# Altium PCB PCB Rev 1.PcbDoc
Units mm, origin at the board's own origin, x right, y up, seen from the top; angles counter-clockwise.
Board outline 128 x 53 mm, 2 copper layers (Top Layer, Bottom Layer); 47 components, 53 nets, 205 pads, 80 vias.
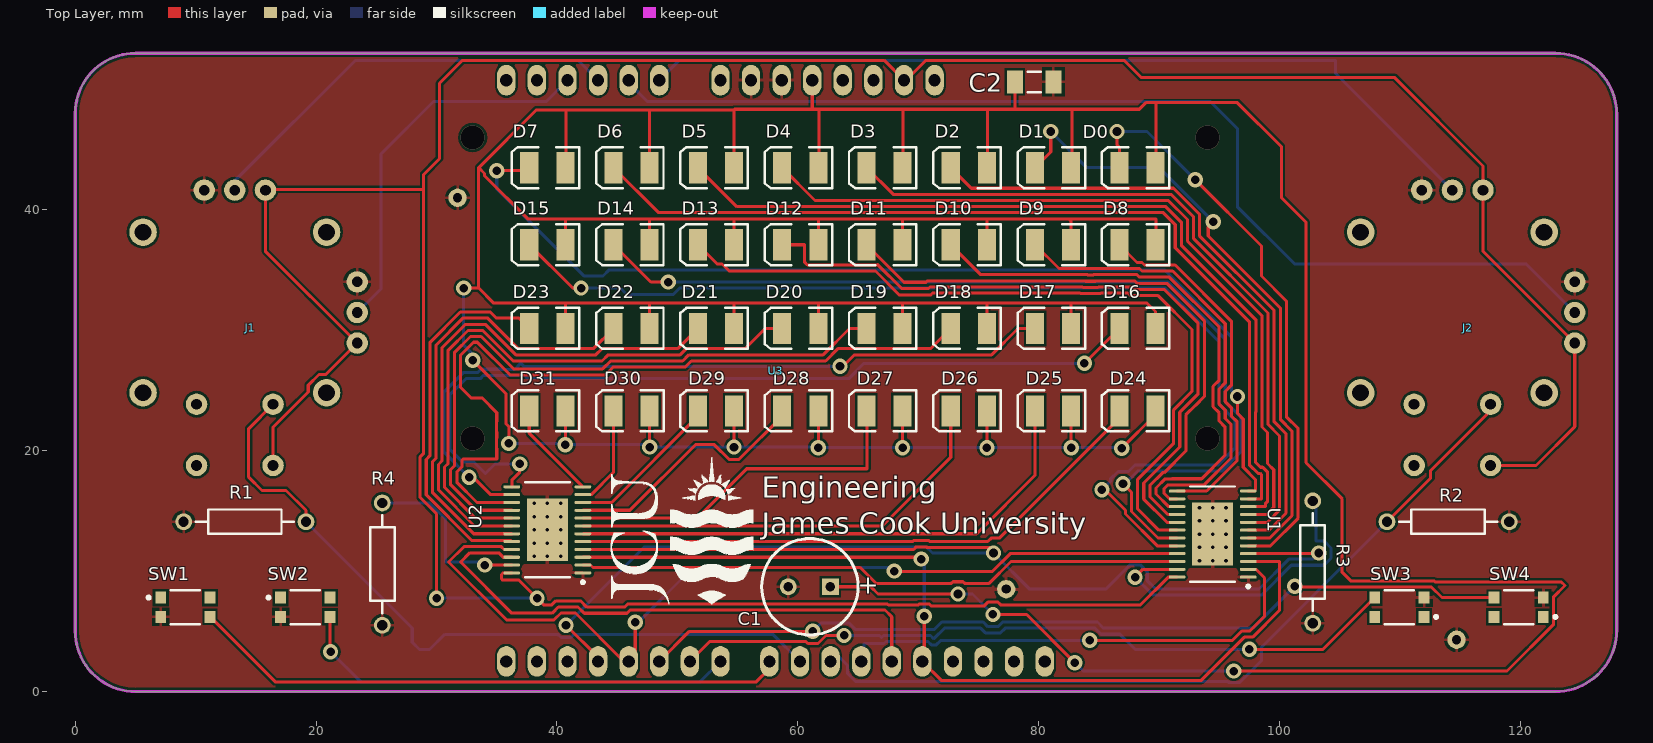
[diagram p0: Top Layer view]
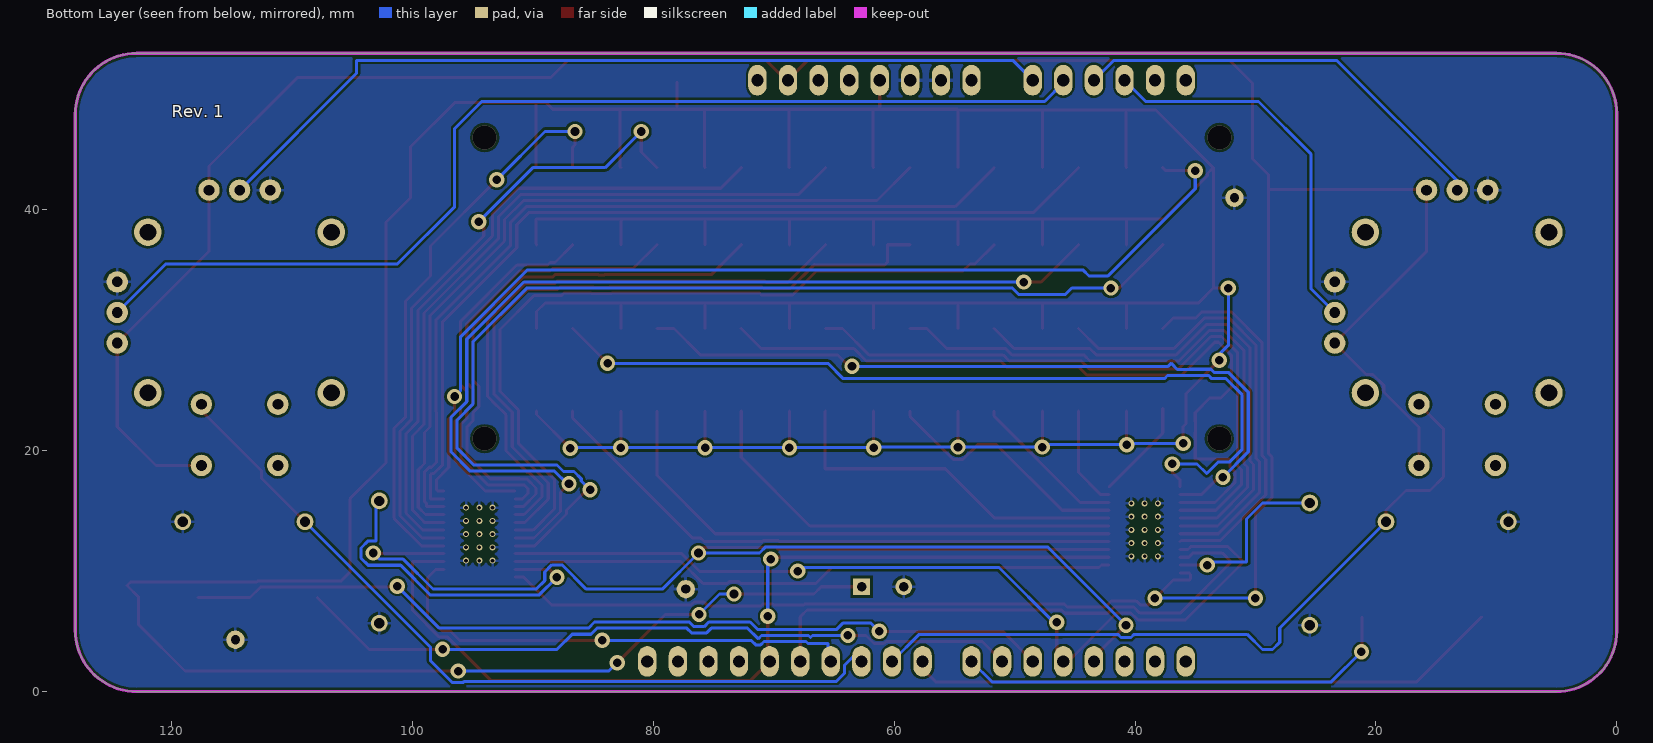
[diagram p1: Bottom Layer view, seen from below]

## Layer stack, top to bottom
Top Solder: solder mask 0.0102, Solder Resist, Dk 3.5
Top Layer: signal copper 0.0356
Dielectric 1: dielectric 0.32, FR-4, Dk 4.8
Bottom Layer: signal copper 0.0356
Bottom Solder: solder mask 0.0102, Solder Resist, Dk 3.5

## Board outline
5,0 cw(c5,5) 0,5 0,48 cw(c5,48) 5,53 122.92,53 cw(c122.92,47.92) 128,47.92 128,5.08 cw(c122.92,5.08) 122.92,0

## Design rules (kind name [scope] priority, off if disabled: settings)
Clearance [All] p1: gap=0.203 ignorepadtopadclearanceinfootprint=FALSE
Height [All] p1: minheight=0 maxheight=50 prefheight=12.7
HoleSize [All] p1: absolutevalues=TRUE maxlimit=3 minlimit=0.3 maxpercent=80.000 minpercent=20.000
PolygonConnect [All] p1: connectstyle=Relief reliefconductorwidth=0.254 reliefentries=4 polygonreliefangle="90 Angle" airgapwidth=0.254
RoutingVias [All] p1: holewidth=0.711 width=1.27 viastyle="Through Hole" minholewidth=0.711 minwidth=1.27 maxholewidth=0.711 maxwidth=1.27
SolderMaskExpansion [All] p1: expansion=0.102
UnRoutedNet [All] p1: checkbadconnections=TRUE
Width [All] p1: maxlimit=0.254 minlimit=0.203 preferedwidth=0.254
27 further rules are at their usual default settings.

## Classes and differential pairs
component class Main_Shield: J1 J2 R1 R2 SW1 SW2 SW3 SW4 U3
component class LED_Controllers: C1 C2 C? D0 D1 D2 D3 D4 D5 D6 D7 D8 D9 D10 D11 D12 D13 D14 D15 D16 D17 D18 D19 D20 D21 D22 D23 D24 D25 D26 D27 D28 D29 D30 D31 R3 R4 U1 U2

## Components (designator, comment, footprint, x,y, rotation, side; value= is the part's Value field where it differs from the comment)
C1 "100uF, 50V" "Capacitor radial 8mm" 62.7,8.7 r180 top
C2 "CAP 1uF" CAPC1206(3216)130_M 79.625,50.625 r0 top value=1uF
D0 "LED3" 3.5X2.8X1.9 88.2,43.5 r180 top
D1 "LED3" 3.5X2.8X1.9 81.2,43.5 r180 top
D2 "LED3" 3.5X2.8X1.9 74.2,43.5 r180 top
D3 "LED3" 3.5X2.8X1.9 67.2,43.5 r180 top
D4 "LED3" 3.5X2.8X1.9 60.2,43.5 r180 top
D5 "LED3" 3.5X2.8X1.9 53.2,43.5 r180 top
D6 "LED3" 3.5X2.8X1.9 46.2,43.5 r180 top
D7 "LED3" 3.5X2.8X1.9 39.2,43.5 r180 top
D8 "LED3" 3.5X2.8X1.9 88.2,37.1 r180 top
D9 "LED3" 3.5X2.8X1.9 81.2,37.1 r180 top
D10 "LED3" 3.5X2.8X1.9 74.2,37.1 r180 top
D11 "LED3" 3.5X2.8X1.9 67.2,37.1 r180 top
D12 "LED3" 3.5X2.8X1.9 60.2,37.1 r180 top
D13 "LED3" 3.5X2.8X1.9 53.2,37.1 r180 top
D14 "LED3" 3.5X2.8X1.9 46.2,37.1 r180 top
D15 "LED3" 3.5X2.8X1.9 39.2,37.1 r180 top
D16 "LED3" 3.5X2.8X1.9 88.2,30.15 r180 top
D17 "LED3" 3.5X2.8X1.9 81.2,30.15 r180 top
D18 "LED3" 3.5X2.8X1.9 74.2,30.15 r180 top
D19 "LED3" 3.5X2.8X1.9 67.2,30.15 r180 top
D20 "LED3" 3.5X2.8X1.9 60.2,30.15 r180 top
D21 "LED3" 3.5X2.8X1.9 53.2,30.15 r180 top
D22 "LED3" 3.5X2.8X1.9 46.2,30.15 r180 top
D23 "LED3" 3.5X2.8X1.9 39.2,30.15 r180 top
D24 "LED3" 3.5X2.8X1.9 88.2,23.3 r180 top
D25 "LED3" 3.5X2.8X1.9 81.2,23.3 r180 top
D26 "LED3" 3.5X2.8X1.9 74.2,23.3 r180 top
D27 "LED3" 3.5X2.8X1.9 67.2,23.3 r180 top
D28 "LED3" 3.5X2.8X1.9 60.2,23.3 r180 top
D29 "LED3" 3.5X2.8X1.9 53.2,23.3 r180 top
D30 "LED3" 3.5X2.8X1.9 46.2,23.3 r180 top
D31 "LED3" 3.5X2.8X1.9 39.2,23.3 r180 top
J1 "Joystick" JOYSTICK 13.25,31.475 r180 top
J2 "Joystick" JOYSTICK 114.35,31.475 r180 top
R1 "Resistor Axial-0.4" AXIAL-0.4 14.08,14.1 r0 top value=10K
R2 "Resistor Axial-0.4" AXIAL-0.4 114,14.1 r180 top value=10K
R3 "Res2" AXIAL-0.4 102.75,10.75 r270 top value=1K
R4 "Res2" AXIAL-0.4 25.5,10.58 r270 top value=1K
SW1 "KMR231GLFS" CKCP-KMR231GLFS 9.15,7 r0 top
SW2 "KMR231GLFS" CKCP-KMR231GLFS 19.1,7 r0 top
SW3 "KMR231GLFS" CKCP-KMR231GLFS 109.95,7 r180 top
SW4 "KMR231GLFS" CKCP-KMR231GLFS 119.85,7 r180 top
U1 "STP16CPC26XTR" "STP16CPC26XTR TSSOP-24" 94.45,13.075 r180 top
U2 "STP16CPC26XTR" "STP16CPC26XTR TSSOP-24" 39.2,13.425 r180 top
U3 "Arduino_Uno" ArduinoUnoR3 99.296,53.3 r180 top locked

## Footprints (in the part's own frame and the unit in brackets; to place one, negate y for a bottom-side part, rotate by r counter-clockwise, add the part's x,y. Pads: shape width x height; smd on the part's side, far side on the other; paste and mask are expansions set on the pad)
3.5X2.8X1.9 [mm] "SM LED; 2 C-Bend Leads; Body 3.5 x 2.8 x 1.9 mm, inc leads (LxWxH typ)"
  rect 1.5x2.6 smd: 1(-1.5,0) 2(1.5,0)
  silkscreen extent -2.65,-1.7 2.95,1.7
ArduinoUnoR3 [mil]
  oval 60x100 hole 40: 0(2500,2000) 1(2400,2000) 2(2300,2000) 3(2200,2000) 4(2100,2000) 5(2000,2000) 6(1900,2000) 7(1800,2000) 8(1640,2000) 9(1540,2000) 10(1440,2000) 11(1340,2000) 12(1240,2000) 13(1140,2000) 14(1040,2000) 15(940,2000) 16(840,2000) 17(740,2000) A0(2000,100) A1(2100,100) A2(2200,100) A3(2300,100) A4(2400,100) A5(2500,100) P1(1800,100) P2(1700,100) P3(1600,100) P4(1500,100) P5(1400,100) P6(1300,100) P7(1200,100) P8(1100,100)
  body extent 690,50 2550,2050, height 335
AXIAL-0.4 [mm] "Axial Device, Thru-Hole; 2 Leads; 0.4 in Pin Spacing"
  round 1.4 hole 0.85: 1(-5.08,0) 2(5.08,0)
  silkscreen extent -4.06,-1.02 4.06,1.02
"Capacitor radial 8mm" [mm] "Radial electrolytic cap, 8mm body, 3.5mm pin separation"
  rect 1.4x1.4 hole 0.8: 1(0,0)
  round 1.4 hole 0.8: 2(3.5,0)
  silkscreen extent -2.3,-4 5.7,4, body extent -2.2,-4 5.8,4, height 11.5
CAPC1206(3216)130_M [mm] "Chip Capacitor, Body 3.2x1.6mm, Height 1.3mm, IPC Low Density"
  rect 1.35x1.9 smd: 1(-1.6,0) 2(1.6,0)
  silkscreen extent -0.55,-0.85 0.55,0.85, body extent -1.7,-0.9 1.7,0.9, height 1.3
CKCP-KMR231GLFS [mm] "SMD, 4-Leads, Body 4.6x2.8mm"
  rect 0.9x1 smd: 1(-2.05,0.8) 2(-2.05,-0.8) 3(2.05,0.8) 4(2.05,-0.8)
  silkscreen extent -3.17,-1.4 1.21,1.4, body extent -2.3,-1.4 2.3,1.4, height 1.92
JOYSTICK [mil] "Sparkfun Joystick COM-09032"
  round 70 hole 35.43: B1A(-125,500) B1B(125,500) B2A(-125,300) B2B(125,300)
  round 70 hole 35: H1(-100,-400) H2(0,-400) H3(100,-400) V1(-400,100) V2(-400,0) V3(-400,-100)
  round 90 hole 55: MOUNT1(-300,262.5) MOUNT2(-300,-262.5) MOUNT3(300,-262.5) MOUNT4(300,262.5)
  body extent -530,-530 520,558, height 1190
"STP16CPC26XTR TSSOP-24" [mm] "TSOP, 24-Leads, Body 7.80x4.40mm, Pitch 0.65mm, Thermal Pad 5.20x3.40mm, IPC Medium Density"
  oval 1.4x0.25 smd mask+0.05: 1(-2.95,3.575) 2(-2.95,2.925) 3(-2.95,2.275) 4(-2.95,1.625) 5(-2.95,0.975) 6(-2.95,0.325) 7(-2.95,-0.325) 8(-2.95,-0.975) 9(-2.95,-1.625) 10(-2.95,-2.275) 11(-2.95,-2.925) 12(-2.95,-3.575) 13(2.95,-3.575) 14(2.95,-2.925) 15(2.95,-2.275) 16(2.95,-1.625) 17(2.95,-0.975) 18(2.95,-0.325) 19(2.95,0.325) 20(2.95,0.975) 21(2.95,1.625) 22(2.95,2.275) 23(2.95,2.925) 24(2.95,3.575)
  rect 3.4x5.2 smd: 25(0,0)
  silkscreen extent -3.08,-3.95 1.85,4.47, body extent -3.19,-3.95 3.19,3.95, height 1.1

## Part data
C1: library part "Cap 100uF, 50V, THT radial", "Electrolytic Capacitor, 100 µF, 50 V, ± 20%, Radial Leaded, 8 mm"
C2: library part CMP-1037-04700-1, "CAP 1uF 25V ±10% 1206 (3216 Metric) Thickness 1.3mm SMD", Case-EIA=1206, Case-Metric=3216, Rated Voltage="25 V", Tolerance=±10%, Max Thickness="1.3 mm", Technology=SMT
D0 D1 D2 D3 D4 D5 D6 D7 D8 D9 D10 D11 D12 D13 D14 D15 D16 D17 D18 D19 D20 D21 D22 D23 D24 D25 D26 D27 D28 D29 D30 D31: "Typical BLUE SiC LED", DatasheetVersion=16-Apr-2002, LatestRevisionDate=17-Dec-2003, LatestRevisionNote="PCB Footprint replaced.", PackageDescription="SM LED; 2 C-Bend Leads; Body 3.5 x 2.8 x 1.9 mm, inc leads (LxWxH typ)", PackageReference=3.5X2.8X1.9, PackageVersion=16-Apr-2002, Published=8-Jun-2000, Publisher="Altium Limited"
J1 J2: "Sparkfun Joystick COM-09032"
R1 R2 R3 R4: "Resistor", LatestRevisionDate=17-Jul-2002, LatestRevisionNote="Re-released for DXP Platform.", PackageDescription="Axial Device, Thru-Hole; 2 Leads; 0.4 in Pin Spacing", PackageReference=AXIAL-0.4, Published=8-Jun-2000, Publisher="Altium Limited"
SW1 SW2 SW3 SW4: library part CMP-2000-06516-1, "Switch Tactile, SPST, 50 mA, 32 V, -40 to 85 degC, 4-Pin SMD, RoHS, Tape and Reel", Actuator Color=N/A, Contact Rating @ Voltage=1A, Dielectric Strength=>=250Vrms, Manufacturer="C&K Components", Maximum DC Voltage Rating=32V, Minimum Insulation Resistance=>=1000MOhm, Operating Force=3N, Operating Temperature=-40to85C, Package Description="4-Pin Surface Mount Device, Body 4.6 x 2.8 mm", Actuator Length=0.5mm, Actuator Style=Button, Base Material=N/A, Body Orientation=Straight, Contact Material=Silver, Contact Plating=Silver, Datasheet URL=http://www.ck-components.com/media/1479/kmr2.pdf, Datasheet Version=06/2016, Dimension=2.8x4.6x1.9mm, ECCN=EAR99, Electrical Life=N/A, Family=KMR2, Ground Terminal=Yes, Housing Material=N/A, HTS=8536501199, Illumination Type=N/R, Manufacturer URL=http://www.ckswitches.com/, Maximum AC Voltage Rating=N/A, Mechanical Life=150000Cycles, Mounting=SurfaceMount,GullWing, Mounting Technology=SurfaceMount, Package Reference=KMR231GLFS, Packaging=TapeandReel, Part No=KMR231GLFS, Pole Throw Configuration=SPST, Product Weight=N/A, RoHS=Yes, Seal Description=N/A, Seal Location=N/A, Supplier=C&KComponents, Switch Configuration=N.O., Type=Micro-Miniature
U1 U2: library part "LED sink driver 16 ch STP16CPC26XTR", "ST Microelectronics STP16CPC26XTR constant current LED sink driver", Supplier Part Number 1=2460710, Supplier 1="element14 APAC", Supplier 2=Digikey, Supplier 3=Newark, Supplier Part Number 2=497-11984-1-ND, Supplier Part Number 3=38Y7958
U3: "Template for building an Arduino shield"

## Free pads (board coordinates)
  round 1.524 hole 0.762: 3(31.75,41) 4(77.3,8.5) 5(114.7,4.3)

## Via types
v1: diameter 1.27, hole 0.711, Top Layer to Bottom Layer, 46 vias
v2: diameter 0.5, hole 0.3, Top Layer to Bottom Layer, 30 vias
v3: diameter 2, hole 2, Top Layer to Bottom Layer, 4 vias

## Nets (pads, with @x,y where several pads share a name; then routed paths per layer and width w, separated by ;. In a path a pad name is that pad's centre, name@x,y a point inside that pad or via, vN(x,y) a via of type N, cw(c..) or ccw(c..) an arc to the next point about the centre after c; other vN are vias at no path point)
5V: C1.1 C2.1 D0.1 D1.1 D2.1 D3.1 D4.1 D5.1 D6.1 D7.1 D8.1 D9.1 D10.1 D11.1 D12.1 D13.1 D14.1 D15.1 D16.1 D17.1 D18.1 D19.1 D20.1 D21.1 D22.1 D23.1 D24.1 D25.1 D26.1 D27.1 D28.1 D29.1 D30.1 D31.1 U3.P4 | length 489.9
  Top Layer w0.254: v1(32.25,33.5) 33.5,33.5 ; v1(33,27.5) 35.75,24.75 35.75,22.25 36,22 v1(36,20.6) ; v1(40.7,20.5) D31.1 ; D23.1 40.7,32.2 40.75,32.25 ; D15.1 40.7,39.2 40.75,39.25 ; D7.1 40.75,43.55 40.75,48.3 ; v1(47.7,20.3) D30.1 ; D22.1 47.7,32.2 47.75,32.25 ; D14.1 47.7,39.2 47.75,39.25 ; D6.1 47.7,48.2 47.8,48.3 ; v1(54.7,20.3) D29.1 ; D21.1 54.7,32.2 54.75,32.25 ; D13.1 54.7,39.2 54.75,39.25 ; D5.1 54.7,48.3 ; U3.P4 61.196,48.35 ; v1(61.7,20.25) D28.1 ; D20.1 61.7,32.2 61.75,32.25 ; D12.1 61.7,39.2 61.75,39.25 ; D4.1 61.75,43.55 61.75,48.35 ; C1.1 66.058,8.7 66.658,8.1 v1(73.3,8.1) ; v1(68.7,20.25) D27.1 ; D19.1 68.7,32.2 68.75,32.25 ; D11.1 68.7,39.2 68.75,39.25 ; D3.1 68.75,43.55 68.75,48.35 ; v1(75.7,20.25) D26.1 ; D18.1 75.7,32.2 75.75,32.25 ; D10.1 75.7,39.2 75.75,39.25 ; D2.1 75.75,43.55 75.75,48.35 ; v1(76.2,6.4) 79,6.4 v1(83,2.4) ; C2.1 78.025,48.35 ; v1(82.7,20.25) D25.1 ; D17.1 82.7,32.2 82.75,32.25 ; D9.1 82.7,39.05 82.5,39.25 ; D1.1 82.75,43.55 82.75,48.35 ; v1(86.9,20.2) 89.7,23 D24.1 ; D16.1 89.7,31.55 89,32.25 82.75,32.25 ; D8.1 89.75,37.15 89.75,39.25 82.5,39.25 ; D0.1 89.75,43.55 89.75,48.9 ; v1(96.2,1.7) 118.889,1.7 122.731,5.542 122.731,7.831 123.7,8.8 123.4,9.1 112.907,9.1 112.818,9.189 105.911,9.189 105.2,9.9 105.2,16 102.2,19 102.2,38.975 100.15,41.025 100.15,45.25 96.5,48.9 89.75,48.9 ; 33.5,33.5 33.5,43.5 ; 33.5,33.5 34.75,32.25 40.75,32.25 ; 33.5,43.5 38.3,48.3 40.75,48.3 ; 33.5,43.5 33.984,43.016 33.984,42.829 37.563,39.25 40.75,39.25 ; 40.75,32.25 47.75,32.25 ; 40.75,39.25 47.75,39.25 ; 40.75,48.3 47.8,48.3 ; 47.75,32.25 54.75,32.25 ; 47.75,39.25 54.75,39.25 ; 47.8,48.3 54.7,48.3 ; 54.7,48.3 54.75,48.35 61.196,48.35 ; 54.75,32.25 61.75,32.25 ; 54.75,39.25 61.75,39.25 ; 61.196,48.35 61.75,48.35 ; 61.75,32.25 68.75,32.25 ; 61.75,39.25 68.75,39.25 ; 61.75,48.35 68.75,48.35 ; 68.75,32.25 75.75,32.25 ; 68.75,39.25 75.75,39.25 ; 68.75,48.35 75.75,48.35 ; 75.75,32.25 82.75,32.25 ; 75.75,39.25 82.5,39.25 ; 75.75,48.35 78.025,48.35 ; 78.025,48.35 82.75,48.35 ; 82.75,48.35 88.35,48.35 88.9,48.9 89.75,48.9
  Bottom Layer w0.254: v1(32.25,33.5) 32.25,28.75 33,28 v1(33,27.5) ; v1(36,20.6) 40.6,20.6 v1(40.7,20.5) 47.5,20.5 v1(47.7,20.3) v1(54.7,20.3) 61.65,20.3 v1(61.7,20.25) v1(68.7,20.25) v1(75.7,20.25) v1(82.7,20.25) 86.85,20.25 v1(86.9,20.2) ; v1(73.3,8.1) 74.5,8.1 v1(76.2,6.4) ; v1(83,2.4) 83.7,1.7 v1(96.2,1.7)
CLK: U1.3 U2.3 U3.13 | length 76.2
  Top Layer w0.254: U2.3 70.1,11.15 v1(70.25,11) ; U3.13@70.5,2.66 U3.13 71.94,0.9 93.463,0.9 97.079,4.516 97.766,4.516 100,6.75 100,10.8 U1.3 ; U3.13@70.5,2.66 v1(70.5,6.25)
  Bottom Layer w0.254: v1(70.25,11) v1@70.5,10.75 ; v1(70.5,6.25) v1@70.5,10.75
GND: C1.2 C2.2 J1.H3 J1.V3 J2.H3 J2.V3 pad.3 pad.4 pad.5 R1.1 R2.1 R3.2 R4.2 SW1.2 SW2.2 SW3.2 SW4.2 U1.1 U1.25 U2.1 U2.25 U3.P2 U3.P3
  other v2: 93.35,10.875 94.45,10.875 95.55,10.875 38.1,11.225 39.2,11.225 40.3,11.225 93.35,11.975 94.45,11.975 95.55,11.975 38.1,12.325 39.2,12.325 40.3,12.325 93.35,13.075 94.45,13.075 95.55,13.075 38.1,13.425 39.2,13.425 40.3,13.425 93.35,14.175 94.45,14.175 95.55,14.175 38.1,14.525 39.2,14.525 40.3,14.525 93.35,15.275 94.45,15.275 95.55,15.275 38.1,15.625 39.2,15.625 40.3,15.625
IOREF: J1.B1A J1.H1 J1.V1 J2.B1A J2.H1 J2.V1 U1.24 U2.24 U3.P7 | length 280.3
  Top Layer w0.254: J1.B1A 16.425,21.95 19.346,24.871 19.346,25.439 20.239,26.332 20.806,26.332 J1.V1 15.79,36.555 J1.H1 15.855,41.7 28.936,41.7 ; v1(30,7.75) 30,14.753 28.636,16.117 28.636,19.483 28.936,19.783 28.936,41.7 ; U2.24 35.525,9.85 35.4,9.725 35.4,9.35 35.5,9.25 36.85,9.25 v1(38.35,7.75) 38.9,7.2 39.576,7.2 39.908,7.532 41.955,7.532 42.479,7.008 45.603,7.008 45.869,7.274 67.444,7.274 67.518,7.2 70.013,7.2 70.079,7.266 70.921,7.266 71.103,7.084 75.447,7.084 75.779,7.416 76.621,7.416 76.837,7.2 88.45,7.2 90.75,9.5 U1.24 ; J2.B1A 121.295,18.775 124.51,21.99 J2.V1 116.89,36.555 J2.H1 116.89,43.635 109.525,51 88.5,51 87.089,52.411 70.641,52.411 68.99,50.76 U3.P7 67.165,52.411 32.161,52.411 30.25,50.5 30.25,44.25 28.936,42.936 28.936,41.7
  Bottom Layer w0.254: v1(30,7.75) v1(38.35,7.75)
J1Press: J1.B2A R1.2 U3.9 | length 61.5
  Top Layer w0.254: J1.B2A 14.4,21.83 14.4,17.8 15.5,16.7 17.5,16.7 19.16,15.04 R1.2
  Bottom Layer w0.254: R1.2 27.984,5.276 27.984,4.079 28.579,3.484 29.421,3.484 30.687,4.75 40.063,4.75 40.329,4.484 41.171,4.484 41.437,4.75 46.063,4.75 46.079,4.734 46.921,4.734 46.937,4.75 57.93,4.75 U3.9
J1XAxis: J1.H2 U3.A2 | length 35.8
  Bottom Layer w0.254: J1.H2 13.25,42.41 23.24,52.4 41.776,52.4 U3.A2
J1YAxis: J1.V2 U3.A3 | length 32
  Bottom Layer w0.254: J1.V2 25.4,33.465 25.4,44.65 29.75,49 39.116,49 U3.A3
J2Press: J2.B2A R2.2 U3.10 | length 67.8
  Top Layer w0.254: R2.2 112.545,17.725 112.545,18.345 J2.B2A@117.5,23.3
  Bottom Layer w0.254: U3.10 62.72,3.58 64.117,2.183 64.117,1.519 64.787,0.849 95.686,0.849 95.8,0.735 96.672,0.735 98.516,2.579 98.516,3.696 R2.2
J2XAxis: J2.H2 U3.A0 | length 71.6
  Bottom Layer w0.254: U3.A0 50.147,52.411 104.649,52.411 104.649,51.336 J2.H2
J2YAxis: J2.V2 U3.A1 | length 90.5
  Bottom Layer w0.254: U3.A1 45.956,50.544 47.5,49 94.25,49 96.5,46.75 96.5,40.25 101.25,35.5 120.485,35.5 J2.V2
LE: U1.4 U2.4 U3.3 | length 114.6
  Top Layer w0.254: v1(40.75,5.5) 43.416,2.834 U3.3 ; U2.4 69.613,11.8 69.829,12.016 70.671,12.016 70.745,11.942 76.25,11.942 v1(76.25,11.5) ; U1.4 103.2,11.45 v1(103.25,11.5)
  Bottom Layer w0.254: v1(40.75,5.5) 47.266,12.016 70.671,12.016 71.187,11.5 v1(76.25,11.5) 79.25,8.5 85.563,8.5 87.579,10.516 88.421,10.516 89.016,9.921 89.016,9.202 89.71,8.508 98.29,8.508 100.774,10.992 102.742,10.992 v1(103.25,11.5)
Left1: SW1.4 U3.8 | length 49.7
  Top Layer w0.254: SW1.4 16.6,0.8 56.55,0.8 57.64,1.89 U3.8
Left2: SW2.4 U3.7 | length 37
  Top Layer w0.254: SW2.4 21.15,3.35 v1(21.2,3.3)
  Bottom Layer w0.254: v1(21.2,3.3) 23.7,0.8 51.876,0.8 U3.7
MISO: U2.22 U3.12 | length 47
  Top Layer w0.254: U2.22 35.541,11.15 35.175,11.516 32.766,11.516 32,10.75 36.242,6.508 39.603,6.508 40.119,7.024 41.744,7.024 42.268,6.5 45.813,6.5 46.079,6.766 67.234,6.766 67.8,6.2 U3.12
  Bottom Layer w0.254: U3.12 U3.12@68,2.7
MOSI: U1.2 U3.11 | length 40.8
  Top Layer w0.254: v1(84.25,4.25) 96.095,4.25 96.869,5.024 97.524,5.024 98.75,6.25 98.75,9.441 98.041,10.15 U1.2
  Bottom Layer w0.254: U3.11 65.5,2.74 65.5,3.984 67.16,3.984 67.327,4.151 70.813,4.151 71.084,3.881 71.504,3.881 71.85,4.226 84.226,4.226 v1(84.25,4.25)
NetD0_2: D0.2 U1.5 | length 48
  Top Layer w0.254: v1(86.5,46.5) 86.5,45.4 86.7,45.2 D0.2 ; v1(93,42.5) 98.5,37 98.5,34.5 100.569,32.431 100.569,22.812 101.548,21.833 101.548,14.393 99.255,12.1 U1.5
  Bottom Layer w0.254: v1(86.5,46.5) 89,46.5 v1(93,42.5)
NetD1_2: D1.2 U1.6 | length 52
  Top Layer w0.254: D1.2 81,44.8 v1(81,46.5) ; v1(94.5,39) 94.078,38.578 94.078,37.828 100.061,31.844 100.061,22.601 101.04,21.622 101.04,14.603 99.187,12.75 U1.6
  Bottom Layer w0.254: v1(81,46.5) 84,43.5 90,43.5 v1(94.5,39)
NetD2_2: D2.2 U1.7 | length 53.8
  Top Layer w0.254: D2.2 74.41,41.79 91.191,41.79 93.371,39.61 93.371,37.816 99.553,31.634 99.553,22.391 100.532,21.412 100.532,14.814 99.118,13.4 U1.7
NetD3_2: D3.2 U1.8 | length 59.2
  Top Layer w0.254: D3.2 67.918,41.282 90.98,41.282 92.863,39.399 92.863,37.606 99.045,31.424 99.045,22.181 100,21.225 100,15.111 100.024,15.087 99.05,14.113 99.05,14.05 U1.8
NetD4_2: D4.2 U1.9 | length 64.7
  Top Layer w0.254: D4.2 61.426,40.774 90.77,40.774 92.355,39.189 92.355,37.395 98.537,31.213 98.537,21.97 99,21.507 99,19.505 ; U1.9 98.918,14.7 99.516,15.298 99.516,18.421 99,18.937 99,19.5
NetD5_2: D5.2 U1.10 | length 70.3
  Top Layer w0.254: D5.2 54.934,40.266 90.56,40.266 91.847,38.979 91.847,37.058 98.029,30.876 98.029,23.229 98,23.2 98,19.034 98.414,18.621 98.598,18.621 99.008,18.21 99.008,15.79 98.85,15.632 98.85,15.35 U1.10
NetD6_2: D6.2 U1.11 | length 75.6
  Top Layer w0.254: D6.2 48.442,39.758 90.349,39.758 91.339,38.768 91.339,36.848 97.521,30.666 97.521,23.439 97.492,23.41 97.492,18.824 98.203,18.113 98.387,18.113 98.5,18 98.5,16 U1.11
NetD7_2: D7.2 U1.12 | length 85
  Top Layer w0.254: v1(35,43.25) 37.45,43.25 D7.2 ; v1(96.505,24.495) 96.505,23.095 96.984,22.616 96.984,18.613 97.992,17.605 97.992,16.742 97.9,16.65 U1.12
  Bottom Layer w0.254: v1(35,43.25) 35,41.75 42.234,34.516 42.421,34.516 42.429,34.508 43.821,34.508 44.329,35.016 90.452,35.016 95.997,29.472 95.997,25.003 v1(96.505,24.495)
NetD8_2: D8.2 U1.13 | length 30.1
  Top Layer w0.254: D8.2 88.171,35.629 88.582,35.629 88.792,35.419 91.331,35.419 95.997,30.753 95.997,25.424 95.489,24.916 95.489,24.074 95.997,23.566 95.997,22.885 96.476,22.406 96.476,19.176 93.95,16.65 U1.13
NetD9_2: D9.2 U1.14 | length 38.6
  Top Layer w0.254: D9.2 81.679,35.121 88.372,35.121 88.582,34.911 91.121,34.911 95.489,30.543 95.489,25.634 94.981,25.126 94.981,23.864 95.489,23.356 95.489,22.674 95.968,22.195 95.968,19.386 93.74,17.158 91.29,17.158 91.288,17.156 90.715,17.156 90.419,16.86 90.419,16.44 90.859,16 U1.14
NetD10_2: D10.2 U1.15 | length 46
  Top Layer w0.254: D10.2 75.187,34.613 84.05,34.613 84.09,34.573 84.511,34.573 84.551,34.613 88.161,34.613 88.371,34.403 90.847,34.403 94.981,30.269 94.981,25.845 94.473,25.337 94.473,23.653 94.981,23.145 94.981,22.464 95.46,21.985 95.46,19.597 93.529,17.666 91.079,17.666 91.077,17.664 90.505,17.664 89.742,16.901 89.742,16.399 90.791,15.35 U1.15
NetD11_2: D11.2 U1.16 | length 50.2
  Top Layer w0.254: D11.2 68.816,33.984 70.64,33.984 70.761,34.105 83.839,34.105 83.879,34.065 84.721,34.065 84.761,34.105 87.951,34.105 88.161,33.895 90.637,33.895 93.75,30.782 93.75,24.5 93.031,23.781 93.028,23.781 92.219,22.972 92.219,19.969 90.422,18.172 90.295,18.172 89.234,17.111 89.234,16.189 90.723,14.7 U1.16
NetD12_2: D12.2 U1.17 | length 58.3
  Top Layer w0.254: D12.2 60.569,37.1 60.569,35.642 60.792,35.419 66.608,35.419 66.635,35.446 68.605,33.476 70.851,33.476 70.972,33.597 83.629,33.597 83.669,33.557 84.931,33.557 84.972,33.597 87.74,33.597 87.95,33.387 90.426,33.387 93.242,30.571 93.242,24.714 91.711,23.182 91.711,20.307 88.726,17.322 88.726,15.978 90.654,14.05 U1.17
NetD13_2: D13.2 U1.18 | length 64.9
  Top Layer w0.254: D13.2 53.3,35.5 53.711,35.5 54.3,34.911 66.452,34.911 68.448,32.915 71.008,32.915 71.182,33.089 83.418,33.089 83.459,33.049 85.142,33.049 85.182,33.089 87.418,33.089 87.642,32.866 89.923,32.866 92.734,30.055 92.734,24.924 91.203,23.393 91.203,20.603 88.218,17.618 88.218,15.158 89.976,13.4 U1.18
NetD14_2: D14.2 U1.19 | length 82.1
  Top Layer w0.254: D14.2 47.8,34 v1(49.25,34) ; v1(87,17.25) 87.71,16.54 87.71,14.948 89.908,12.75 U1.19
  Bottom Layer w0.254: v1(49.25,34) 90.75,34 95.489,29.261 95.489,24.074 96.8,22.763 96.8,19.9 95.2,18.3 88.205,18.3 87.155,17.25 v1(87,17.25)
NetD15_2: D15.2 U1.20 | length 91.4
  Top Layer w0.254: D15.2 41.3,33.5 v1(42,33.5) ; v1(85.25,16.75) 85.5,16.75 87.202,15.048 87.202,14.737 89.839,12.1 U1.20
  Bottom Layer w0.254: v1(42,33.5) 45.25,33.5 45.766,32.984 49.671,32.984 50.179,33.492 90.508,33.492 94.981,29.019 94.981,23.864 96.292,22.553 96.292,20.192 94.908,18.808 87.995,18.808 87.453,18.266 86.579,18.266 85.984,17.671 85.984,17.484 v1(85.25,16.75)
NetD16_2: D16.2 U2.13 | length 72
  Top Layer w0.254: U2.13 36.25,17.55 36.9,18.2 v1(36.9,18.9) v1@36.7,18.9 ; v1(83.8,27.25) D16.2
  Bottom Layer w0.254: v1(36.9,18.9) 34.85,18.9 34.05,18.1 33.105,19.045 32.174,19.045 31.108,20.11 31.108,24.64 32.444,25.976 33.631,25.976 33.905,26.25 35.25,26.25 35.25,26.234 37.298,26.234 37.548,25.984 64.234,25.984 65.5,27.25 v1(83.8,27.25)
NetD17_2: D17.2 U2.14 | length 63.6
  Top Layer w0.254: v1(32.7,17.8) 33.041,17.8 34.491,16.35 U2.14 ; v1(63.5,27) 63.75,27 64.711,27.961 76.1,27.961 78.289,30.15 D17.2
  Bottom Layer w0.254: v1(32.7,17.8) 30.6,19.9 30.6,24.85 32.25,26.5 32.563,26.5 32.579,26.484 33.421,26.484 33.695,26.758 35.46,26.758 35.476,26.742 36.492,26.742 37,27.25 37.25,27 v1(63.5,27)
NetD18_2: D18.2 U2.15 | length 64.5
  Top Layer w0.254: U2.15 33.363,15.7 31.684,17.379 31.684,18.221 32.1,18.637 32.1,19.2 32.2,19.3 35,19.3 35,20.163 34.984,20.179 34.984,21.021 35,21.037 35,21.563 34.984,21.579 34.984,22.421 35,22.437 35,23.153 33.772,24.381 32.869,24.381 31.984,25.266 31.984,27.921 33.063,29 33.39,29 36.109,26.281 44.007,26.281 44.671,26.945 50.65,26.945 51.158,27.453 62.31,27.453 63.326,28.469 71.019,28.469 D18.2
NetD19_2: D19.2 U2.16 | length 54.3
  Top Layer w0.254: U2.16 33.295,15.05 31.176,17.169 31.176,18.431 31.476,18.731 31.476,28.131 32.821,29.476 33.702,29.476 36.389,26.789 43.796,26.789 44.46,27.453 50.44,27.453 50.948,27.961 62.1,27.961 64.289,30.15 D19.2
NetD20_2: D20.2 U2.17 | length 48.7
  Top Layer w0.254: U2.17 33.226,14.4 30.668,16.958 30.668,18.642 30.968,18.942 30.968,28.342 32.61,29.984 33.84,29.984 36.371,27.453 43.742,27.453 44.25,27.961 50.229,27.961 50.737,28.469 55.608,28.469 57.289,30.15 D20.2
NetD21_2: D21.2 U2.18 | length 43.3
  Top Layer w0.254: U2.18 33.158,13.75 30.16,16.748 30.16,18.852 30.46,19.152 30.46,28.552 32.4,30.492 34.051,30.492 36.582,27.961 43.229,27.961 43.737,28.469 50.019,28.469 D21.2
NetD22_2: D22.2 U2.19 | length 37.8
  Top Layer w0.254: U2.19 33.089,13.1 29.652,16.537 29.652,19.063 29.952,19.362 29.952,28.762 32.189,31 34.261,31 36.792,28.469 43.019,28.469 D22.2
NetD23_2: D23.2 U2.20 | length 31.4
  Top Layer w0.254: U2.20 36.168,12.532 32.939,12.532 29.144,16.327 29.144,19.273 29.444,19.573 29.444,28.973 31.979,31.508 34.471,31.508 34.979,31 36.85,31 D23.2
NetD24_2: D24.2 U2.5 | length 49.5
  Top Layer w0.254: U2.5 69.545,12.45 69.619,12.524 70.881,12.524 70.955,12.45 75.763,12.45 76.05,12.737 76.737,12.737 85.15,21.15 86.7,22.7 D24.2
NetD25_2: D25.2 U2.6 | length 44.9
  Top Layer w0.254: U2.6 74.85,13.1 79.7,17.95 D25.2
NetD26_2: D26.2 U2.7 | length 36.8
  Top Layer w0.254: U2.7 67,13.75 72.7,19.45 D26.2
NetD27_2: D27.2 U2.8 | length 30.1
  Top Layer w0.254: U2.8 51.65,14.4 55.75,18.5 65.75,18.5 65.75,23.25 D27.2
NetD28_2: D28.2 U2.9 | length 21.2
  Top Layer w0.254: U2.9 46.05,15.05 51.5,20.5 53.063,20.5 54.279,19.284 55.121,19.284 58.7,22.863 D28.2
NetD29_2: D29.2 U2.10 | length 13
  Top Layer w0.254: U2.10 44.537,15.7 51.7,22.863 D29.2
NetD30_2: D30.2 U2.11 | length 8.4
  Top Layer w0.254: U2.11 42.85,16.35 44.7,18.2 D30.2
NetD31_2: D31.2 U2.12 | length 8.3
  Top Layer w0.254: D31.2@37.7,23.5 37.7,21.45 U2.12
NetR3_1: R3.1 U1.23 | length 27.4
  Top Layer w0.254: v1(88,9.5) 88.65,10.15 U1.23
  Bottom Layer w0.254: v1(88,9.5) 89.5,8 98.5,8 100.984,10.484 103.671,10.484 104.266,11.079 104.266,11.921 103.671,12.516 103.046,12.516 103.031,12.531 R3.1@103.031,15.664
NetR4_1: R4.1 U2.23 | length 15
  Top Layer w0.254: v1(34,10.5) U2.23
  Bottom Layer w0.254: R4.1 29.42,15.66 30.75,14.33 30.75,10.75 33.75,10.75 v1(34,10.5)
NetU1_22: U1.22 U2.2 | length 50.8
  Top Layer w0.254: U2.2 42.791,10.5 42.991,10.3 65.176,10.3 66.492,8.984 72.747,8.984 72.879,9.116 73.721,9.116 73.853,8.984 75.889,8.984 77.705,10.8 U1.22
OE: U1.21 U2.21 U3.4 | length 76.2
  Top Layer w0.254: U2.21 35.609,11.8 35.385,12.024 32.274,12.024 31,10.75 35.803,5.947 39.761,5.947 40.329,6.516 41.534,6.516 45.55,2.5 U3.4 46.5,3.044 v1(46.5,5.75) ; v1(68,10) 68.016,9.984 76.171,9.984 77.637,11.45 U1.21
  Bottom Layer w0.254: v1(46.5,5.75) 46.5,5.5 51.3,10.3 67.7,10.3 v1(68,10)
Right1: SW3.4 U3.6 | length 61.3
  Top Layer w0.254: U3.6 52.687,4.151 60.662,4.151 60.829,3.984 61.671,3.984 62.346,4.659 v1(63.841,4.659) ; v1(97.5,3.5) 103.6,3.5 SW3.4
  Bottom Layer w0.254: v1(63.841,4.659) 66.782,4.659 66.949,4.492 67.116,4.659 71.024,4.659 71.294,4.389 72.171,5.266 75.179,5.266 75.569,4.876 76.831,4.876 77.221,5.266 84.671,5.266 85.179,4.758 86.742,4.758 88,3.5 v1(97.5,3.5)
Right2: SW4.4 U3.5 | length 73.5
  Top Layer w0.254: U3.5 50.996,5 v1(61.25,5) ; v1(101.25,8.75) 101.319,8.681 112.608,8.681 113.489,7.8 SW4.4
  Bottom Layer w0.254: v1(61.25,5) 61.925,5.675 64.262,5.675 64.77,5.167 71.354,5.167 71.961,5.774 75.389,5.774 75.779,5.384 76.621,5.384 77.011,5.774 84.881,5.774 85.389,5.266 97.766,5.266 v1(101.25,8.75)
pads on no net: J1.B1B J1.B2B J1.MOUNT1 J1.MOUNT2 J1.MOUNT3 J1.MOUNT4 J2.B1B J2.B2B J2.MOUNT1 J2.MOUNT2 J2.MOUNT3 J2.MOUNT4 SW1.1 SW1.3 SW2.1 SW2.3 SW3.1 SW3.3 SW4.1 SW4.3 U3.0 U3.1 U3.2 U3.14 U3.15 U3.16 U3.17 U3.A4 U3.A5 U3.P1 U3.P5 U3.P6 U3.P8
copper on no net:
  other v3: 33,21 94,21 33,46 94,46

## Polygon pours and split planes (outlines as drawn)
GND on Top Layer "Top Ground" (solid, remove dead copper, pour order 0): 4.826,0 cw(c4.826,4.826) 0,4.826 0,48.174 cw(c4.826,48.174) 4.826,53 123.174,53 cw(c123.174,48.174) 128,48.174 128,4.826 cw(c123.174,4.826) 123.174,0
GND on Bottom Layer "Bottom Ground" (solid, remove dead copper, pour order 2): 4.826,0 cw(c4.826,4.826) 0,4.826 0,48.174 cw(c4.826,48.174) 4.826,53 123.174,53 cw(c123.174,48.174) 128,48.174 128,4.826 cw(c123.174,4.826) 123.174,0

## Keep-outs
Keep-Out Layer:
  the board outline again, w0.254

## Silkscreen, mask and mechanical layers (free items; w line width, h text height)
Top Overlay:
  drawing of 17 lines, arcs and shapes, not listed
  text "Engineering / James Cook University" at 57,12.5 h3
Bottom Overlay:
  text "Rev. 1" at 120,47.7 h1

## Text inside footprints (layer, text, board x,y; h text height)
C1: Top Overlay "+" at 66.7,9.45 h1.52 r180